# Altium PCB Current_Measurement.PcbDoc
Units mil, origin at the board's own origin, x right, y up, seen from the top; angles counter-clockwise.
Board outline 1705.03 x 1770.03 mil, 2 copper layers (Top Layer, Bottom Layer); 9 components, 10 nets, 39 pads, 0 vias.
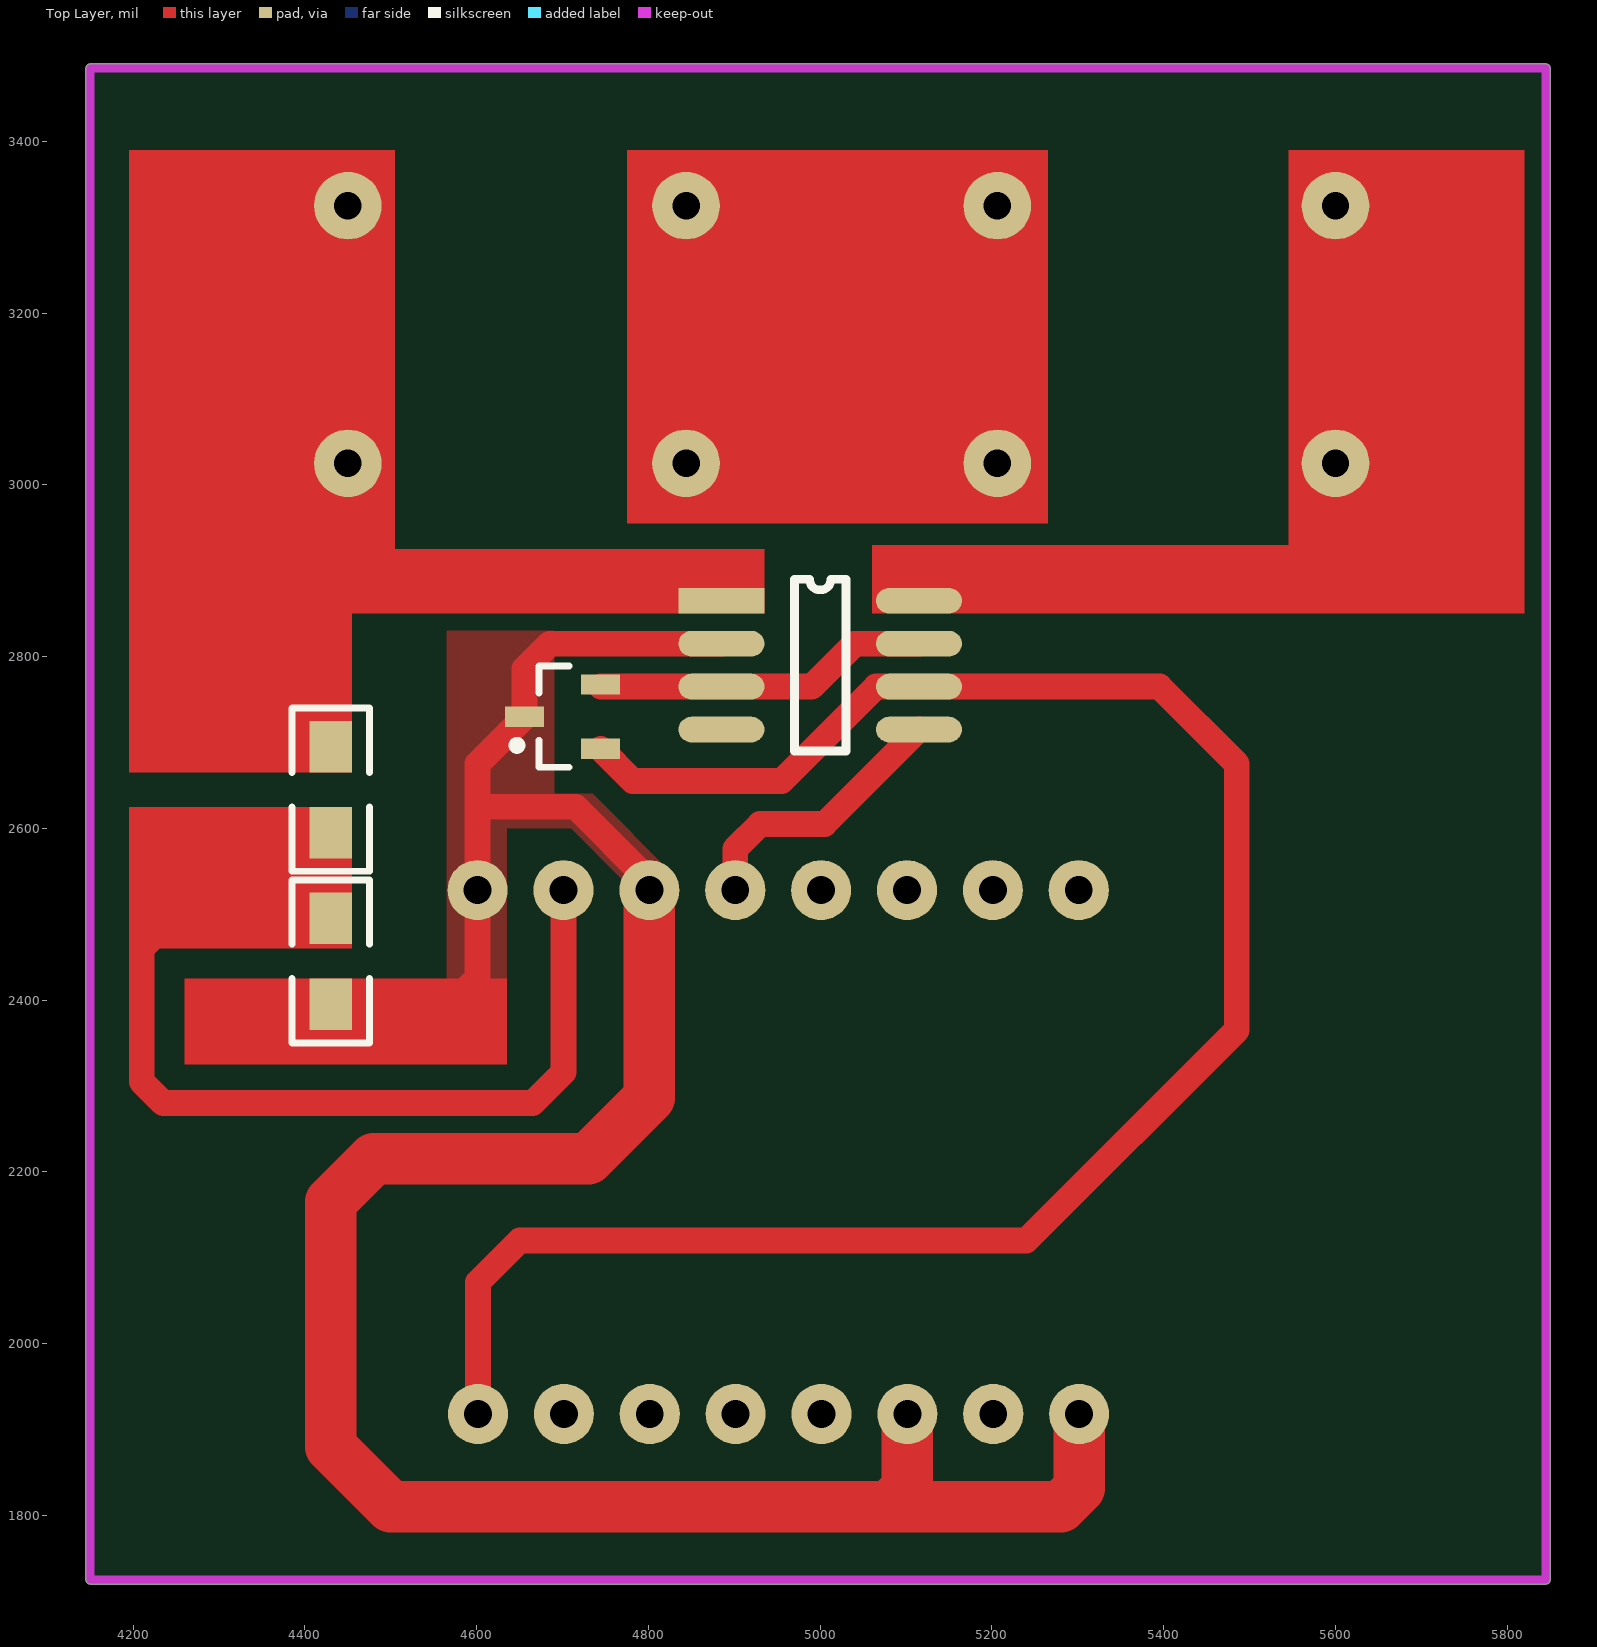
[diagram p0: Top Layer view]
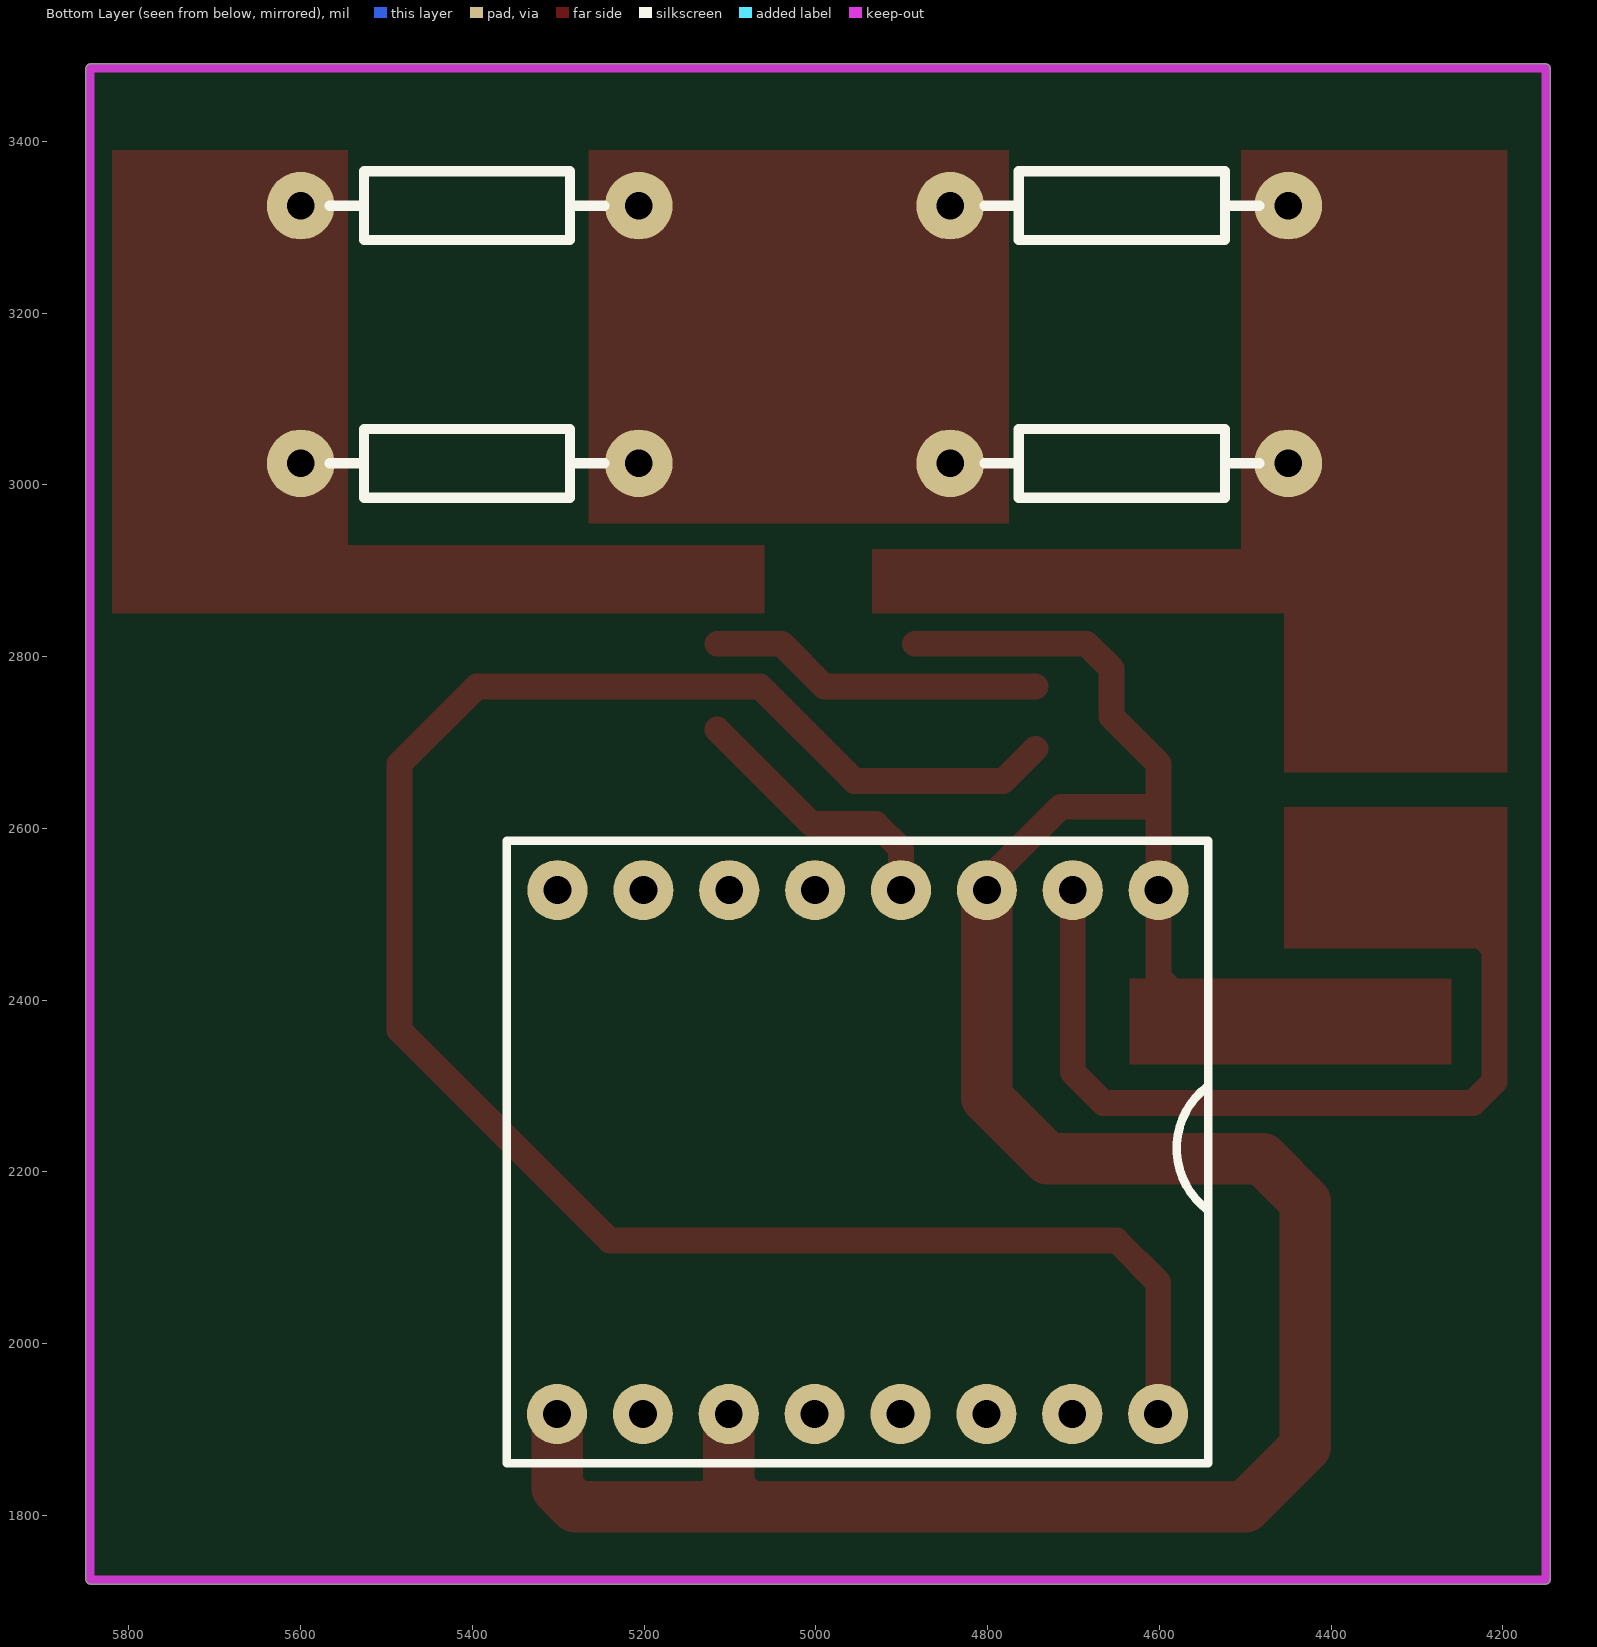
[diagram p1: Bottom Layer view, seen from below]
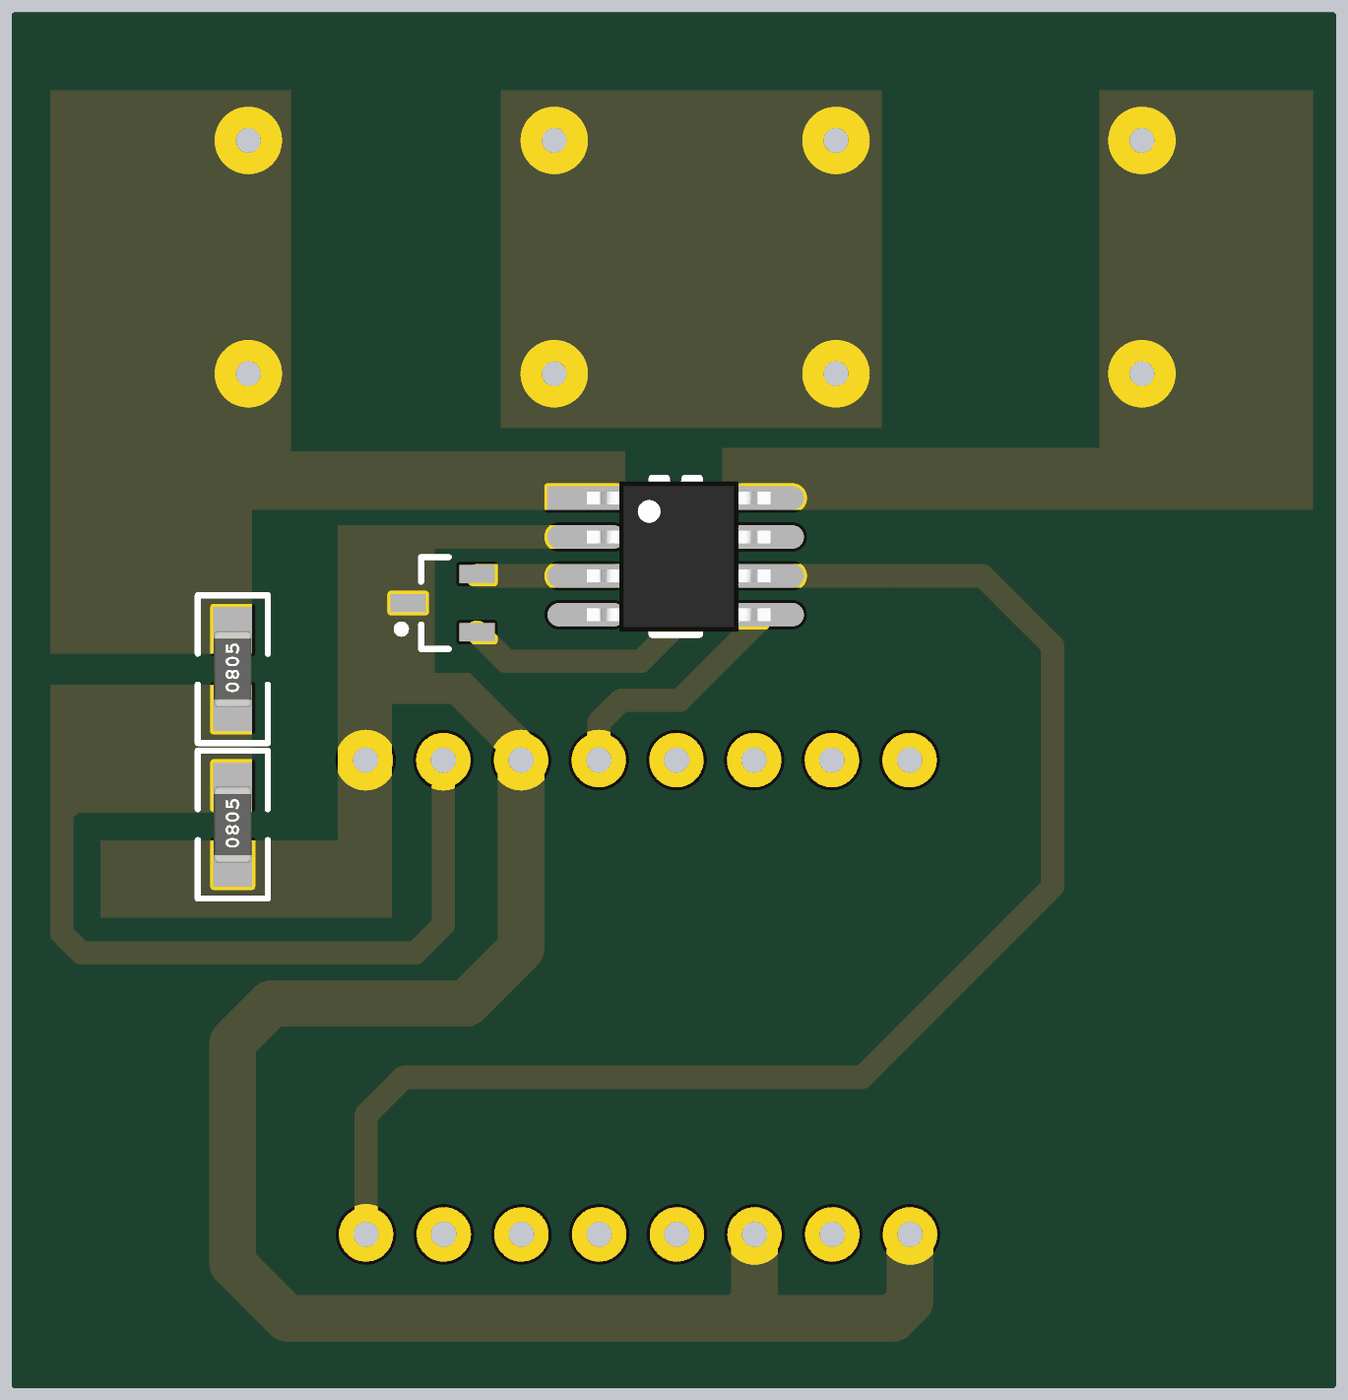
[diagram p2: 3D render of the assembled board from above, using the file's embedded part models]

## Layer stack, top to bottom
Top Solder: solder mask 0.4, Solder Resist, Dk 3.5
Top Layer: signal copper 1.4
Dielectric 1: dielectric 12.6, FR-4, Dk 4.8
Bottom Layer: signal copper 1.4
Bottom Solder: solder mask 0.4, Solder Resist, Dk 3.5

## Board outline
4144.98,1725 ccw(c4150,1725) 4150,1719.98 5845,1719.98 ccw(c5845,1725) 5850.02,1725 5850.02,3485 ccw(c5845,3485) 5845,3490.01 4150,3490.01 ccw(c4150,3485) 4144.98,3485

## Design rules (kind name [scope] priority, off if disabled: settings)
Clearance [All] p1: gap=10
PolygonConnect [All] p1: connectstyle=Direct reliefconductorwidth=10 reliefentries=4 polygonreliefangle="90 Angle" airgapwidth=10
RoutingVias [All] p1: holewidth=28 width=50 viastyle="Through Hole" minholewidth=28 minwidth=50 maxholewidth=28 maxwidth=50
SolderMaskExpansion [All] p1: expansion=4
Width [All] p1: maxlimit=100 minlimit=10 preferedwidth=10 minimp=50.000000 maximp=50.000000 favimp=50.000000
30 further rules are at their usual default settings.

## Classes and differential pairs
component class Sheet2: " " R1 R2 R3 R4 U1 U2

## Components (designator, comment, footprint, x,y, rotation, side; value= is the part's Value field where it differs from the comment)
P1 "ADS1256_Dream" ADS1256_Dream 4955,2225 r270 bottom
R1 "RES" 0805r 4430,2600 r90 top
R2 "RES" 0805r 4430,2400 r90 top
Rsense1 "RES" AXIAL0.4#1 5206.3,3025 r0 bottom
Rsense2 "RES" AXIAL0.4#1 5206.3,3325 r0 bottom
Rsense3 "RES" AXIAL0.4#2 4443.7,3325 r0 bottom
Rsense4 "RES" AXIAL0.4#2 4443.7,3025 r0 bottom
U1 "INA282" SOIC8 4885,2865 r0 top
U2 "REF3020" SOT23_N 4700,2730 r180 top

## Footprints (in the part's own frame and the unit in brackets; to place one, negate y for a bottom-side part, rotate by r counter-clockwise, add the part's x,y. Pads: shape width x height; smd on the part's side, far side on the other; paste and mask are expansions set on the pad)
0805r [mil]
  rect 60x50 smd: 1(-5,0) 2(95,0)
  silkscreen extent -50,-45 140,45, body extent -4,-24 94,25, height 31
ADS1256_Dream [mil]
  round 70 hole 32.5: 1(-303,354) 2(-303,254) 3(-303,154) 4(-303,54) 5(-303,-46) 6(-303,-146) 7(-303,-246) 8(-303,-346) 9(307,-346.5) 10(307,-246.5) 11(307,-146.5) 12(307,-46.5) 13(307,53.5) 14(307,153.5) 15(307,253.5) 16(307,353.5)
  silkscreen extent -361,-405 365,412
AXIAL0.4#1 [mm]
  round 2 hole 0.813: 1(0,0) 2(10,0)
  silkscreen extent 1.02,-1.02 9.14,1.02
AXIAL0.4#2 [mm]
  round 2 hole 0.813: 1(0.16,0) 2(10.16,0)
  silkscreen extent 1.02,-1.02 9.14,1.02
SOIC8 [mil]
  rect 100x30 smd: 1(0,0)
  oval 100x30 smd: 2(0,-50) 3(0,-100) 4(0,-150) 5(230,-150) 6(230,-100) 7(230,-50) 8(230,0)
  silkscreen extent 85,-175 145,25, body extent 1,-171 237,21, height 69
SOT23_N [mm] "SOT23, 3-Leads, Body 2.9x1.3mm, Pitch 0.95mm, Lead Span 2.3mm - Reverse Pinning, IPC Medium Density"
  rect 1.15x0.6 smd: 1(1.125,0) 2(-1.125,-0.95) 3(-1.125,0.95)
  silkscreen extent -0.2,-1.5 1.47,1.5, body extent -0.7,-1.5 0.7,1.5, height 1.1

## Part data
P1: library part ADS1256
U1: library part Component_1

## Nets (pads, with @x,y where several pads share a name; then routed paths per layer and width w, separated by ;. In a path a pad name is that pad's centre, name@x,y a point inside that pad or via, vN(x,y) a via of type N, cw(c..) or ccw(c..) an arc to the next point about the centre after c; other vN are vias at no path point)
+5V: P1.16 U1.6 U2.3 | length 2307.7
  Top Layer w30: P1.16 4601.5,2071.5 4650,2120 5240,2120 5485,2365 5485,2675 5395,2765 U1.6 5065,2765 4955,2655 4781.89,2655 U2.3
GND: P1.1 P1.3 P1.9 P1.11 R2.1 U1.2 U2.1 | length 3115.2
  Top Layer w30: R2.1 4570,2395 4601,2426 P1.1 4601,2625 ; P1.3 4801,2539 4715,2625 4601,2625 ; U1.2 4685,2815 4655.71,2785.71 U2.1 4601,2675.29 4601,2625
  Top Layer w60: P1.3 4801,2286 4730,2215 4480,2215 4430,2165 4430,1880 4500,1810 5080,1810 ; P1.11 5101.5,1831.5 5080,1810 ; P1.9 5301.5,1831.5 5280,1810 5080,1810
INA282_OUT: P1.4 U1.5 | length 319.6
  Top Layer w30: P1.4 4901,2576 4930,2605 5005,2605 U1.5
NetLoad_1: Rsense1.2 Rsense2.2 U1.8
NetLoad_2: 
NetP1_2: P1.2 R1.1 R2.2 | length 1217.8
  Top Layer w30: R1.1 R2.2 4245,2495 4210,2460 4210,2305 4235,2280 4665,2280 4701,2316 P1.2
NetP1_3: 
NetRsense1_1: Rsense1.1 Rsense2.1 Rsense3.2 Rsense4.2
NetRsense3_1: R1.2 Rsense3.1 Rsense4.1 U1.1 | length 445
  Top Layer w30: 4440,2865 U1.1
NetU1_3: U1.3 U1.7 U2.2 | length 391.4
  Top Layer w30: U2.2@4744.29,2765 U1.3 4990,2765 5040,2815 U1.7
pads on no net: P1.5 P1.6 P1.7 P1.8 P1.10 P1.12 P1.13 P1.14 P1.15 U1.4

## Polygon pours and split planes (outlines as drawn)
GND on Top Layer "Top Layer-No Net" (solid, pour order 6): 4690,2830 4690,2640 4735,2640 4830,2545 4830,2535 4775,2535 4765,2545 4710,2600 4695,2600 4635,2600 4635,2395 4635,2365 4565,2365 4565,2830

## Keep-outs
Keep-Out Layer:
  lines w10: 4150,1725 5845,1725 5845,3485 4150,3485 4150,1725

## Other copper
Top Layer:
  rectangle net NetLoad_1: 5545,2850 5820,3390
  rectangle net NetRsense3_1: 4195,2665 4455,3390
  rectangle net GND: 4260,2325 4635,2425
  rectangle net NetP1_2: 4195,2460 4455,2625
  rectangle net NetLoad_1: 5545,2855 5660,2970
  rectangle net NetLoad_1: 5060,2850 5660,2930
  rectangle net NetRsense3_1: 4400,2850 4505,2970
  rectangle net NetRsense3_1: 4400,2850 4935,2925
  rectangle net NetRsense3_1: 4400,2960 4505,3390
  rectangle net NetLoad_1: 5545,2955 5660,3390
  rectangle net NetRsense1_1: 4775,2955 5265,3390